# Altium PCB PCB.PcbDoc (part 1 of 2)
Units mm, origin at the board's own origin, x right, y up, seen from the top; angles counter-clockwise.
Board outline 143.9 x 84.61 mm, 2 copper layers (Top Layer, Bottom Layer); 156 components, 117 nets, 550 pads, 1112 vias.
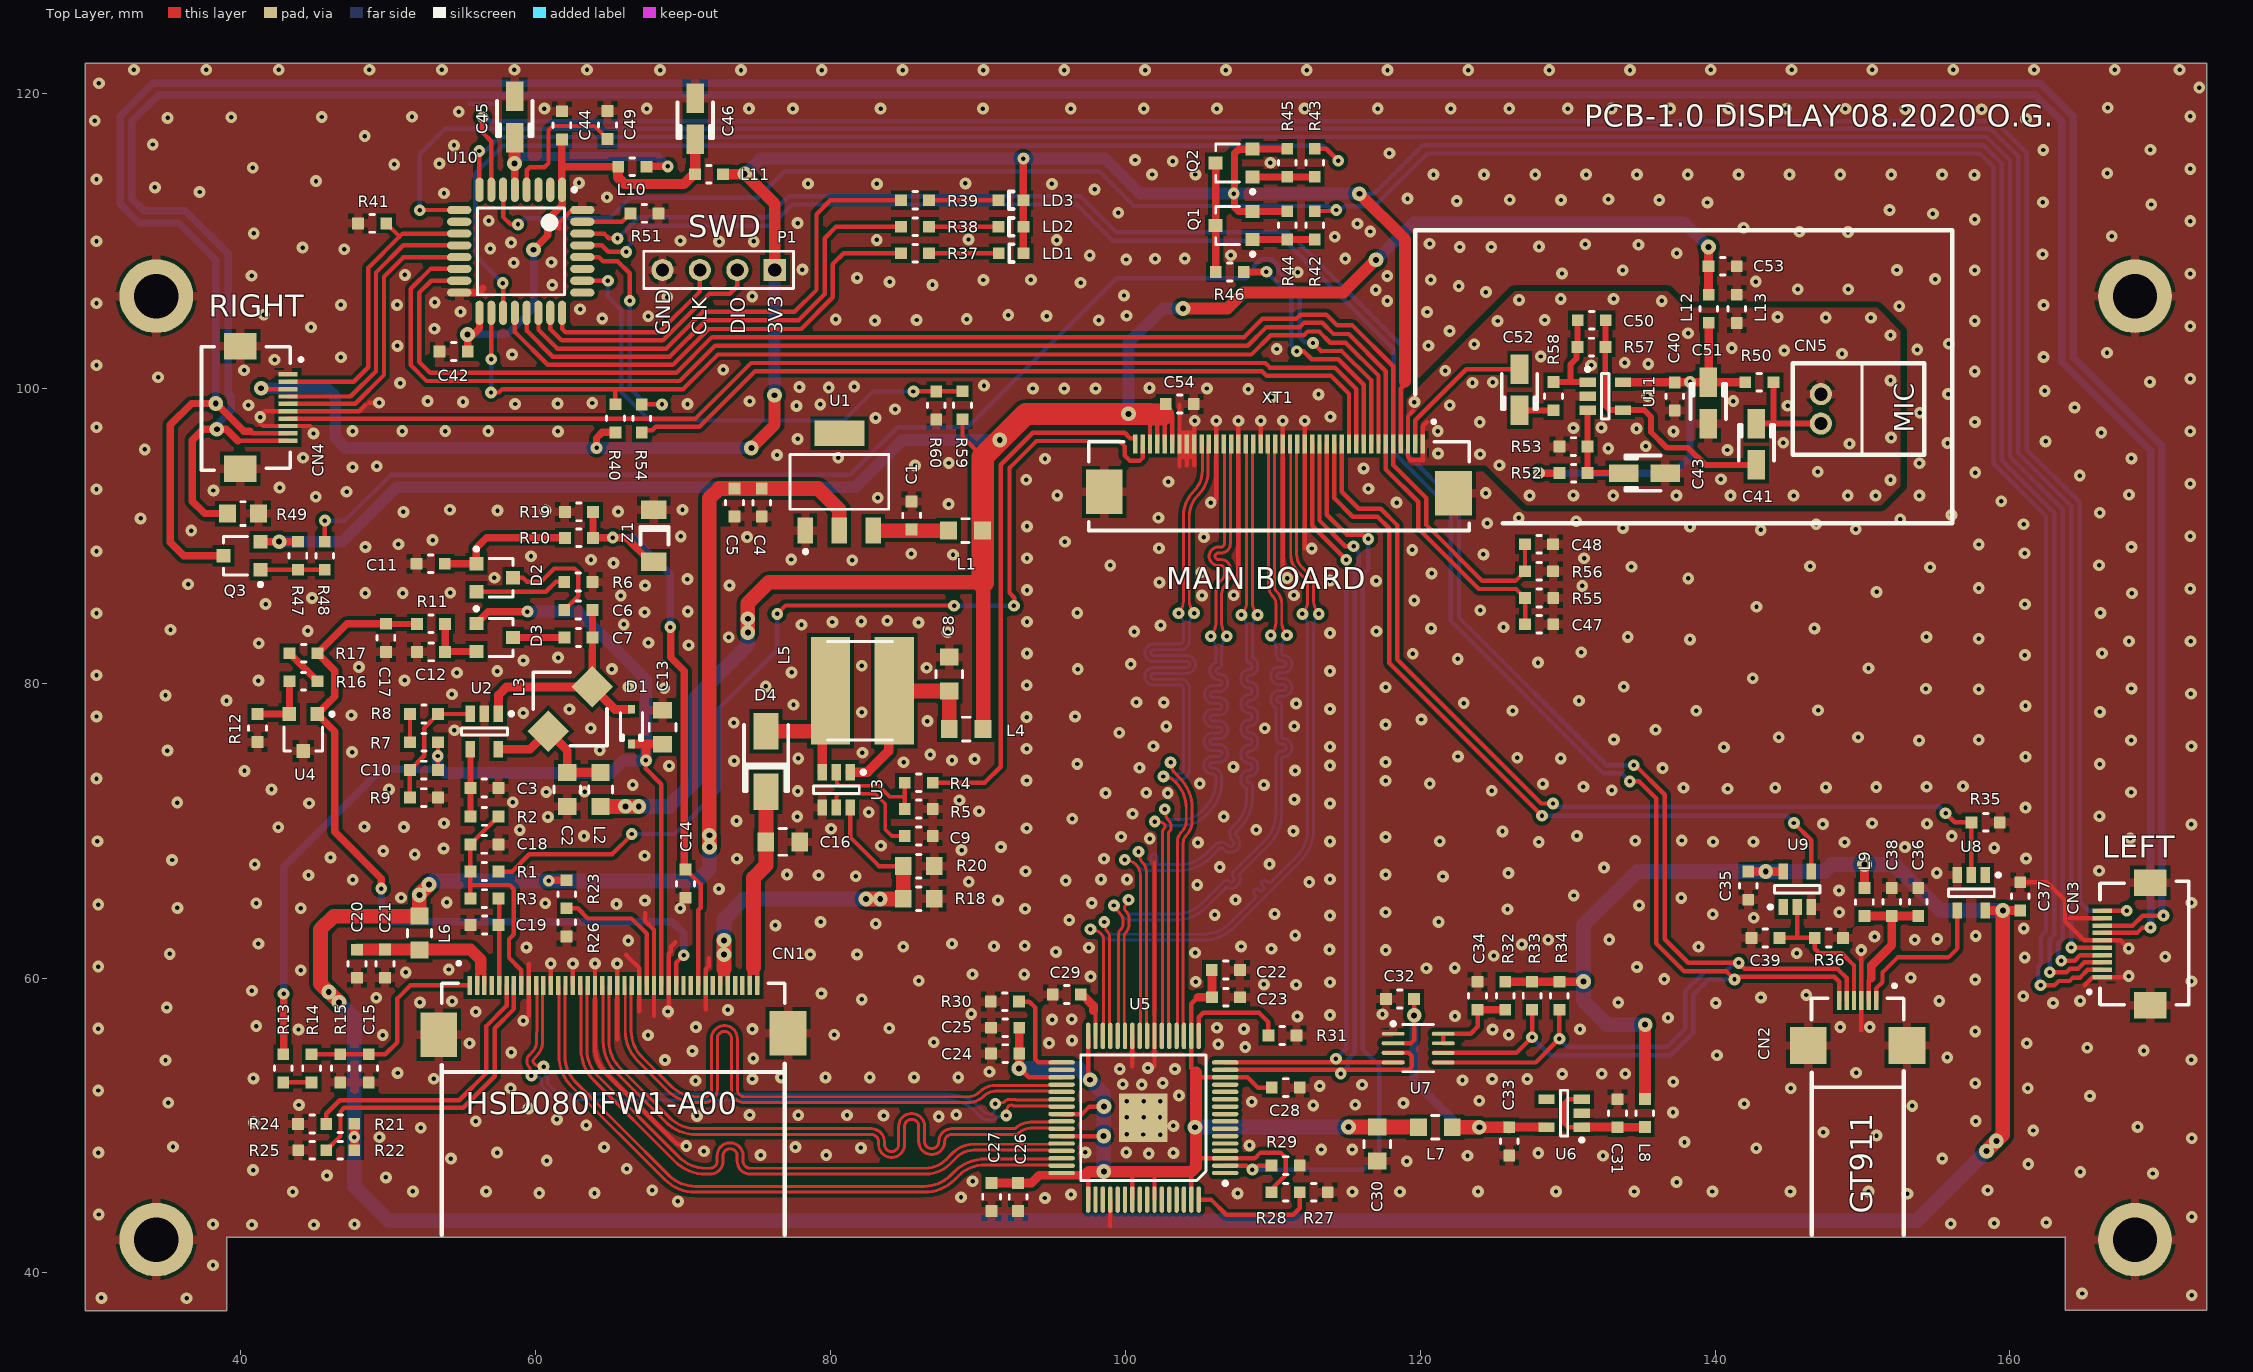
[diagram p0: Top Layer view]
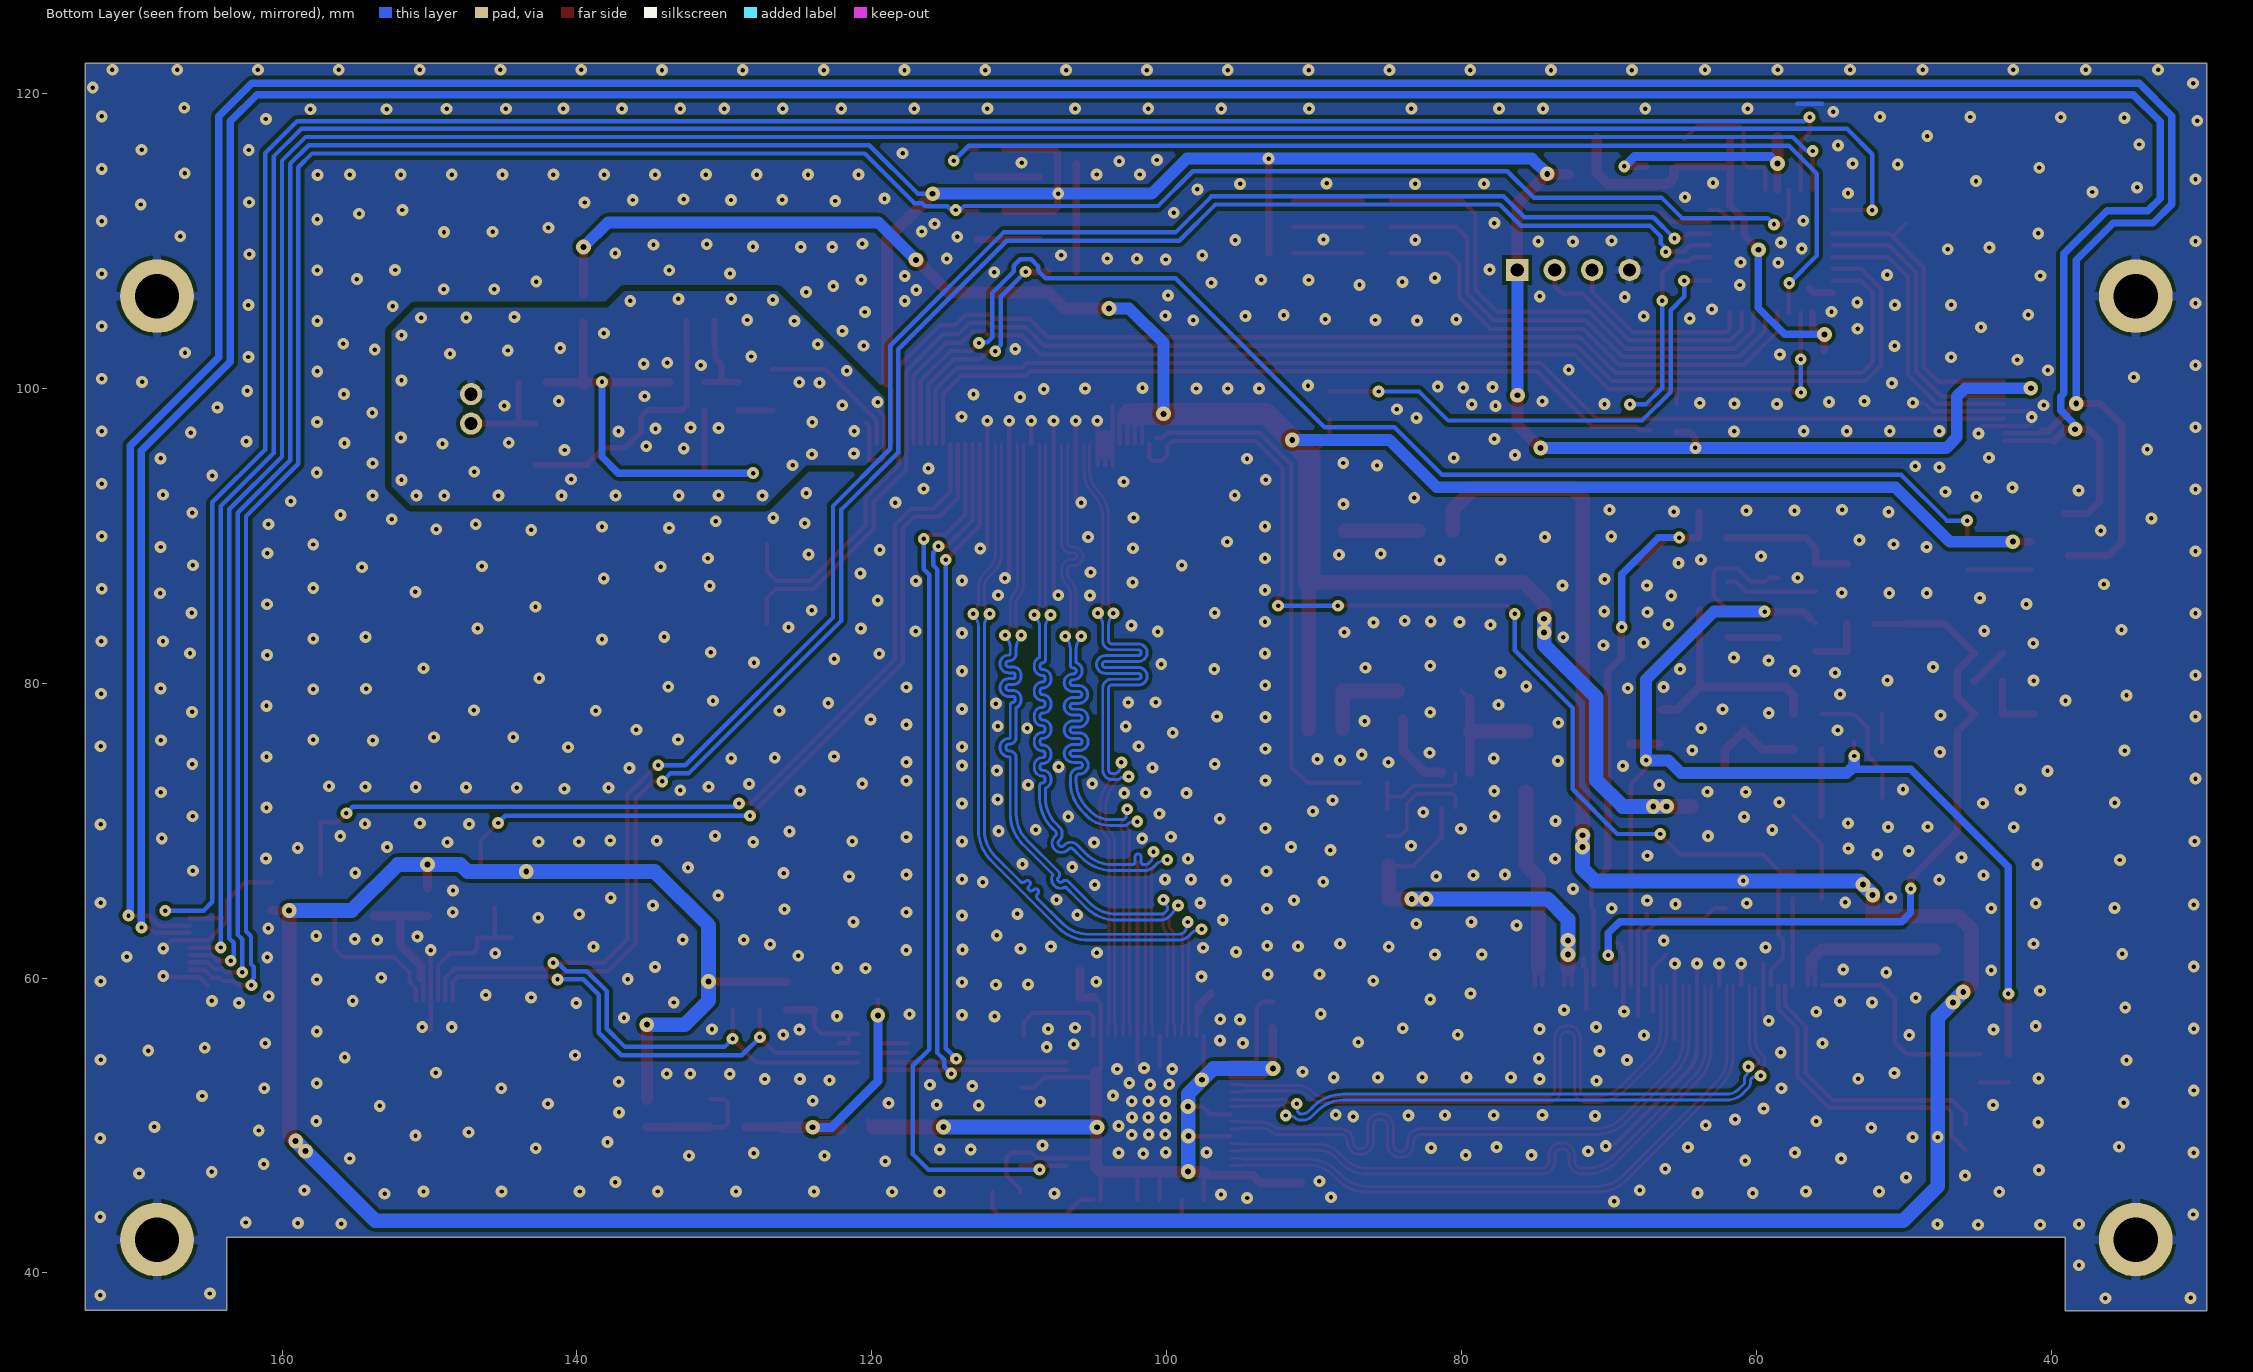
[diagram p1: Bottom Layer view, seen from below]

## Layer stack, top to bottom
Top Solder: solder mask 0.0102, Solder Resist, Dk 3.5
Top Layer: signal copper 0.0356
Dielectric 1: dielectric 0.32, FR-4, Dk 4.8
Bottom Layer: signal copper 0.0356
Bottom Solder: solder mask 0.0102, Solder Resist, Dk 3.5

## Board outline
29.45,37.44 39.06,37.44 39.06,42.43 163.75,42.43 163.75,37.45 173.35,37.45 173.35,122.05 29.45,122.05

## Design rules (kind name [scope] priority, off if disabled: settings)
Clearance [All] p1: gap=0.2 ignorepadtopadclearanceinfootprint=FALSE except(0.25: Arc-Fill Arc-Poly Arc-Region Track-Fill Track-Poly Track-Region SMDPad-Fill SMDPad-Poly SMDPad-Region THPad-Fill THPad-Poly THPad-Region Via-Fill Via-Poly Via-Region; 0.4: Fill-Fill Fill-Poly Fill-Region Poly-Poly Poly-Region Region-Region)
DiffPairsRouting [All] p1: maxlimit=0.254 minlimit=0.2 mostfreqgap=0.2 toplayer_minwidth=0.2 toplayer_maxwidth=0.381 toplayer_prefwidth=0.2 bottomlayer_minwidth=0.2 bottomlayer_maxwidth=0.381 bottomlayer_prefwidth=0.2 maxuncoupledlength=12.7
PolygonConnect [All] p1: thpad.connectstyle=Relief thpad.reliefconductorwidth=0.6 thpad.reliefentries=4 thpad.polygonreliefangle="90 Angle" thpad.airgapwidth=0.254 smdpad.connectstyle=Relief smdpad.reliefconductorwidth=0.6 smdpad.reliefentries=4 smdpad.polygonreliefangle="90 Angle" smdpad.airgapwidth=0.254 via.connectstyle=Direct via.reliefconductorwidth=0.254 via.reliefentries=4 via.polygonreliefangle="90 Angle" via.airgapwidth=0.254
RoomDefinition mipi_to_lvds [InComponentClass('mipi_to_lvds')] p1 off: confinementstyle=ConfineIn formatcopy=TRUE lockcomponents=FALSE outline 57.36,0 108.16,0 108.16,25.4 57.36,25.4
RoomDefinition mcu_mic_amp_connector [InComponentClass('mcu_mic_amp_connector')] p2 off: confinementstyle=ConfineIn formatcopy=TRUE lockcomponents=FALSE outline 179.895,29.05 196.145,29.05 196.145,32.85 179.895,32.85
RoomDefinition touch_panel [InComponentClass('touch_panel')] p3 off: confinementstyle=ConfineIn formatcopy=TRUE lockcomponents=FALSE outline 0,0 52.74,0 52.74,25.4 0,25.4
RoomDefinition panel_power_backlight [InComponentClass('panel_power_backlight')] p4 off: confinementstyle=ConfineIn formatcopy=TRUE lockcomponents=FALSE outline 174.875,22.7 199.725,22.7 199.725,27.925 174.875,27.925
RoutingVias [All] p1: holewidth=0.711 width=1.27 viastyle="Through Hole" minholewidth=0.711 minwidth=1.27 maxholewidth=0.711 maxwidth=1.27
SolderMaskExpansion [All] p1: expansion=0.102
Width [All] p1: maxlimit=2 minlimit=0.2 preferedwidth=0.3 minimp=50.000000 maximp=50.000000 favimp=50.000000
29 further rules are at their usual default settings.

## Classes and differential pairs
component class mcu_mic_amp_connector: C40 C41 C42 C43 C44 C45 C46 C47 C48 C49 C50 C51 C52 C53 C54 CN3 CN4 CN5 L10 L11 L12 L13 LD1 LD2 LD3 P1 P2 Q1 Q2 Q3 R37 R38 R39 R40 R41 R42 R43 R44 R45 R46 R47 R48 R49 R50 R51 R52 R53 R54 R55 R56 R57 R58 R59 R60 U10 U11 XT1
component class touch_panel: C31 C32 C33 C34 C35 C36 C37 C38 C39 CN2 L8 L9 R32 R33 R34 R35 R36 U6 U7 U8 U9
component class mipi_to_lvds: C22 C23 C24 C25 C26 C27 C28 C29 C30 L7 R27 R28 R29 R30 R31 U5
component class panel_power_backlight: C1 C2 C3 C4 C5 C6 C7 C8 C9 C10 C11 C12 C13 C14 C15 C16 C17 C18 C19 C20 C21 CN1 D1 D2 D3 D4 L1 L2 L3 L4 L5 L6 R1 R2 R3 R4 R5 R6 R7 R8 R9 R10 R11 R12 R13 R14 R15 R16 R17 R18 R19 R20 R21 R22 R23 R24 R25 R26 U1 U2 U3 U4 Z1
differential pair MIPI_TX_D3: +MIPI_TX_D3_P -MIPI_TX_D3_N
differential pair MIPI_TX_D2: +MIPI_TX_D2_P -MIPI_TX_D2_N
differential pair MIPI_TX_D1: +MIPI_TX_D1_P -MIPI_TX_D1_N
differential pair MIPI_TX_D0: +MIPI_TX_D0_P -MIPI_TX_D0_N
differential pair MIPI_TX_CLK: +MIPI_TX_CLK_P -MIPI_TX_CLK_N
differential pair LVDS_CLK: +LVDS_CLK_P -LVDS_CLK_N
differential pair LVDS_CH3: +LVDS_CH3_P -LVDS_CH3_N
differential pair LVDS_CH2: +LVDS_CH2_P -LVDS_CH2_N
differential pair LVDS_CH1: +LVDS_CH1_P -LVDS_CH1_N
differential pair LVDS_CH0: +LVDS_CH0_P -LVDS_CH0_N

## Components (designator, comment, footprint, x,y, rotation, side; value= is the part's Value field where it differs from the comment)
C1 "CC0603MRX5R5BB106" C0603 85.5,92.33 r270 top value="10uF 6.3V"
C2 "CL21A226MAQNNNE" C0805 62.14,73.74 r270 top value="22uF 25v"
C3 "CC0603KRX7R9BB105" C0603 55.57,72.895 r0 top value=1uF
C4 "CC0603MRX5R5BB106" C0603 75.335,91.3 r90 top value="10uF 6.3V"
C5 "C1608X7R1H104K080AA" C0603 73.485,93.205 r270 top value=0.1uF
C6 "GRM188R71E474KA12D" C0603 63.85,84.97 r180 top value="0.47uF 25v"
C7 "GRM188R71E474KA12D" C0603 63.855,83.1 r180 top value="0.47uF 25v"
C8 "CL21A226MAQNNNE" C0805 88.05,79.67 r90 top value="22uF 25v"
C9 "CC0603ZRY5V8BB224" C0603 85.035,69.64 r0 top value=0.22uF
C10 "CL10C220JB8NNNC" C0603 51.47,74.105 r0 top value=22pF
C11 "CC0603KRX7R9BB105" C0603 53.83,88.1 r180 top value=1uF
C12 "CC0603KRX7R9BB105" C0603 53.855,82.125 r180 top value=1uF
C13 "CL21A226MAQNNNE" C0805 68.604,76.06 r90 top value="22uF 25v"
C14 "CC0603KRX7R9BB105" C0603 70.16,67.355 r270 top value=1uF
C15 "CC0603KRX7R9BB105" C0603 48.675,54.825 r270 top value=1uF
C16 "CL21A226MAQNNNE" C0805 75.81,69.23 r0 top value="22uF 25v"
C17 "CC0603KRX7R9BB105" C0603 49.84,84.03 r270 top value=1uF
C18 "CL10B103KB8NNNC" C0603 55.57,69.065 r0 top value=0.01uF
C19 "C1608X7R1H104K080AA" C0603 57.48,63.6 r180 top value=0.1uF
C20 "CC0603MRX5R5BB106" C0603 47.875,61.925 r270 top value="10uF 6.3V"
C21 "C1608X7R1H104K080AA" C0603 49.775,60.025 r90 top value=0.1uF
C22 "CL10B103KB8NNNC" C0603 107.77,60.55 r180 top value=0.01uF
C23 "C1608X7R1H104K080AA" C0603 105.875,58.7 r0 top value=0.1uF
C24 "CL10B103KB8NNNC" C0603 90.895,56.625 r0 top value=0.01uF
C25 "C1608X7R1H104K080AA" C0603 92.8,54.875 r180 top value=0.1uF
C26 "CL10B103KB8NNNC" C0603 92.725,44.2 r90 top value=0.01uF
C27 "C1608X7R1H104K080AA" C0603 90.925,46.105 r270 top value=0.1uF
C28 "C1608X7R1H104K080AA" C0603 109.93,52.57 r0 top value=0.1uF
C29 "CL21B105KAFNNNE" C0603 96.98,58.88 r180 top value=1uF
C30 "CL21A226MQQNNNE" C0805 117.08,49.69 r270 top value="22uF 6.3V"
C31 "CC0603MRX5R5BB106" C0603 133.38,51.785 r270 top value="10uF 6.3V"
C32 "C1608X7R1H104K080AA" C0603 117.675,58.58 r0 top value=0.1uF
C33 "CC0603MRX5R5BB106" C0603 126.04,47.97 r90 top value="10uF 6.3V"
C34 "C1608X7R1H104K080AA" C0603 123.89,57.845 r90 top value=0.1uF
C35 "C1608X7R1H104K080AA" C0603 142.25,65.315 r90 top value=0.1uF
C36 "C1608X7R1H104K080AA" C0603 153.79,66.115 r270 top value=0.1uF
C37 "C1608X7R1H104K080AA" C0603 160.7,66.495 r270 top value=0.1uF
C38 "CC0603MRX5R5BB106" C0603 151.99,66.115 r270 top value="10uF 6.3V"
C39 "GRM1885C1H8R0DA01D" C0603 142.465,62.72 r0 top value=8pF
C40 "CC0603KRX7R9BB104" C0603 137.26,98.5 r90 top value=0.1uF
C41 "293D105X9035A2TE3" TANTAL-A-1206 142.8,96.21 r270 top value=1uF
C42 "CC0603KRX7R9BB104" C0603 53.485,102.5 r0 top value=0.1uF
C43 "293D225X9010A2TE3" TANTAL-A-1206 135.22,94.25 r0 top value=2.2uF
C44 "CC0603KRX7R9BB104" C0603 61.78,118.795 r270 top value=0.1uF
C45 "293D226X9010A2TE3" TANTAL-A-1206 58.58,118.41 r90 top value=22uF
C46 "293D226X9010A2TE3" TANTAL-A-1206 70.82,118.29 r90 top value=22uF
C47 "CL10B103KB8NNNC" C0603 127.115,84 r0 top value=0.01uF
C48 "CL10B103KB8NNNC" C0603 127.11,89.42 r0 top value=0.01uF
C49 "CC0603KRX7R9BB104" C0603 64.87,116.915 r90 top value=0.1uF
C50 "CC0603GRNPO9BN150" C0603 130.68,104.62 r0 top value=15pF
C51 "293D226X9010A2TE3" TANTAL-A-1206 139.541,99 r270 top value=22uF
C52 "293D105X9035A2TE3" TANTAL-A-1206 126.74,99.9 r90 top value=1uF
C53 "CC0603KRX7R9BB104" C0603 141.47,108.29 r180 top value=0.1uF
C54 "C1608X7R1H104K080AA" C0603 102.735,98.94 r0 top value=0.1uF
CN1 "FH12-40" 40S-0.5SH#1 65.275,59.5 r180 top locked value=HSD080IFW1-A00
CN2 "Touch panel" 6S-0.5SH 149.675,58.475 r0 top
CN3 "LEFT" 10S-0.5SH 169.26,62.41 r90 top locked
CN4 "RIGHT" 10S-0.5SH 40.2,98.6 r270 top locked
CN5 "MIC" MW-2M 147.78,98.61 r90 top locked value=MW-2MR
D1 "PMEG2010EJ.115" SOD-323 66.5,77.05 r270 top value=1A
D2 "BAV99.215" SOT-23-3 57.225,87.15 r270 top value=BAV99
D3 "BAV99.215" SOT-23-3 57.225,83.1 r270 top value=BAV99
D4 "SS24" SMA 75.625,74.69 r270 top
L1 "BLM21PG221SN1D" IND0805 90.1,90.355 r180 top value=EMIF
L2 "BLM21PG221SN1D" IND0805 64.4,71.84 r90 top value=EMIF
L3 "CDRH3D16NP-100NC" CDRH3D16 62.338,78.25 r90 top value=10uH
L4 "BLM21PG221SN1D" IND0805 90.15,76.89 r180 top value=EMIF
L5 "CDRH6D28-100NC" CDRH6D28 82,79.49 r180 top locked value=10uH
L6 "BLM21PG221SN1D" IND0805 52.12,62.1 r90 top value=EMIF
L7 "BLM21PG221SN1D" IND0805 121.98,49.88 r180 top value=EMIF
L8 "BLM18AG102SN1D" IND0603 135.24,49.89 r90 top value=EMIF
L9 "BLM18AG102SN1D" IND0603 150.13,66.105 r270 top value=EMIF
L10 "BLM18AG102SN1D" IND0603 65.605,115.03 r0 top value=EMIF
L11 "BLM18AG102SN1D" IND0603 72.705,114.53 r180 top value=EMIF
L12 "BLM18AG102SN1D" IND0603 139.57,106.355 r270 top value=EMIF
L13 "BLM18AG102SN1D" IND0603 141.47,106.345 r270 top value=EMIF
LD1 "FYLS-0603URC" LED0603 92.2,109.17 r0 top
LD2 "KPT-1608SGC" LED0603 92.19,110.96 r0 top
LD3 "FYLS-0603UYC" LED0603 92.19,112.76 r0 top
P1 "SWD" PLS-4 76.22,108.03 r180 top
Q1 "IRLML6402" SOT-23-3 107.38,111.05 r90 top
Q2 "IRLML6402" SOT-23-3 107.38,115.29 r90 top
Q3 "IRLML6402" SOT-23-3 40.08,88.65 r90 top
R1 "100" R0603 57.475,67.225 r180 top
R2 "47k" R0603 57.475,70.965 r180 top
R3 "47k" R0603 55.575,65.39 r0 top
R4 "100" R0603 86.94,73.25 r180 top
R5 "47k" R0603 85.035,71.465 r0 top
R6 "100" R0603 63.85,86.87 r180 top
R7 "120k" R0603 53.375,76 r180 top value="120k 1%"
R8 "750" R0603 51.475,77.91 r0 top
R9 "18k" R0603 51.47,72.24 r0 top value="18k 1%"
R10 "2k" R0603 63.885,89.86 r180 top
R11 "330" R0603 51.95,84.025 r0 top
R12 "3k" R0603 41.13,77.91 r270 top value="3.09k 1%"
R13 "RC0603FR-0720KL" R0603 42.875,54.83 r270 top value="20k 1%"
R14 "RC0603FR-071K5L" R0603 44.8,52.925 r90 top value="1.5k 1%"
R15 "10kRC0603FR-0710KL" R0603 46.75,54.83 r270 top value="10k 1%"
R16 "0" R0603 43.3,80.13 r0 top
R17 "19.1k 1%" R0603 45.205,82.03 r180 top
R18 "RC0805FR-071RL" R0805 85.03,65.37 r0 top value=1
R19 "470k" R0603 63.885,91.62 r180 top
R20 "RES 0805 2R4 5%" R0805 85.03,67.595 r0 top value=2.4
R21 "0" R0603 45.795,50.11 r0 top
R22 "DNI" R0603 45.795,48.32 r0 top value=NI
R23 "DNI" R0603 62.1,64.73 r90 top value=NI
R24 "DNI" R0603 43.887,50.097 r0 top value=NI
R25 "0" R0603 43.895,48.32 r0 top
R26 "0" R0603 62.1,62.825 r90 top
R27 "10k" R0603 111.825,45.475 r0 top
R28 "DNI" R0603 109.92,45.475 r0 top
R29 "10k" R0603 109.92,47.28 r0 top value=100k
R30 "10k" R0603 92.78,58.4 r180 top
R31 "10k" R0603 109.7,56.1 r0 top
R32 "200k" R0603 125.765,57.845 r90 top
R33 "4.7k" R0603 127.59,57.845 r90 top
R34 "4.7k" R0603 129.44,57.845 r90 top
R35 "47k" R0603 157.405,70.56 r0 top value=100k
R36 "47k" R0603 146.765,62.72 r0 top value=100k
R37 "1k" R0603 84.785,109.17 r0 top
R38 "1k" R0603 84.785,110.96 r0 top
R39 "1k" R0603 84.785,112.76 r0 top
R40 "20k" R0603 65.41,97.015 r90 top
R41 "100k" R0603 49.86,111.19 r180 top
R42 "1k" R0603 112.84,110.105 r90 top
R43 "1k" R0603 112.84,116.255 r270 top
R44 "100k" R0603 110.98,112.01 r270 top
R45 "100k" R0603 110.98,116.255 r270 top
R46 "1k" R0603 106.125,107.896 r0 top
R47 "47k" R0603 43.87,87.69 r90 top
R48 "1k" R0603 45.69,89.595 r270 top
R49 "0" R0805 39.2,91.51 r0 top
R50 "5.6k" R0603 143.96,100.41 r180 top
R51 "1k" R0603 68.33,111.87 r180 top
R52 "100k" R0603 131.35,94.25 r180 top
R53 "100k" R0603 129.445,96.05 r0 top
R54 "100" R0603 67.2,97.01 r90 top
R55 "100k" R0603 129.02,85.78 r180 top
R56 "100k" R0603 129.015,87.59 r180 top
R57 "75k" R0603 132.57,102.8 r180 top
R58 "49.9" R0603 129.04,98.52 r90 top
R59 "47k" R0603 88.95,97.905 r90 top
R60 "100k" R0603 87.17,97.89 r90 top
U1 "LM1117" SOT-223 80.6,93.65 r0 top value=LM1117-3.3
U2 "TPS61040" SOT-23-5 56.525,76.725 r270 top
U3 "TPS61165" SOT-23-6 80.4,72.765 r180 top locked value=TPS61165DBV
U4 "LM431ACM3" SOT-23-3 44.23,76.655 r180 top
U5 "SN65DSI83" HPM064_N 101.225,50.525 r180 top locked
U6 "TLV75718PDBVR" SOT-23-5 129.76,50.84 r180 top value=TLV733P
U7 "PCA9306DCTR" PSOP-8 119.865,55.245 r0 top locked
U8 "SN74LVC1G17" SOT-23-5 157.39,65.79 r270 top locked value=SN74LVC1G08
U9 "SN74LVC1G17" SOT-23-5 145.58,66.02 r90 top locked value=SN74LVC1G08
U10 "STM32L052K6/K8" STM-LQFP32_N 58.99,109.3 r270 top
U11 "OPA172IDBVR" SOT-23-5 132.56,99.47 r0 top
XT1 "FH12-40" 40S-0.5SH#2 110.42,96.23 r0 top locked
Z1 "BZV55-C10.115" SOD-80C 68.01,90 r90 top value=10V

## Footprints (in the part's own frame and the unit in brackets; to place one, negate y for a bottom-side part, rotate by r counter-clockwise, add the part's x,y. Pads: shape width x height; smd on the part's side, far side on the other; paste and mask are expansions set on the pad)
6S-0.5SH [mm]
  rect 0.3x1.3 smd: 1(1.25,0) 2(0.75,0) 3(0.25,0) 4(-0.25,0) 5(-0.75,0) 6(-1.25,0)
  rect 2.5x2.5 smd: ""(-3.35,-3.05) ""(3.35,-3.05)
  silkscreen extent -3.12,-5.87 3.12,1.1, body extent -4.25,-4.8 4.25,0.1, height 1.9
10S-0.5SH [mm]
  rect 0.3x1.3 smd: 1(-2.35,3) 2(-1.85,3) 3(-1.35,3) 4(-0.85,3) 5(-0.35,3) 6(0.15,3) 7(0.65,3) 8(1.15,3) 9(1.65,3) 10(2.15,3)
  rect 1.8x2.2 smd: ""(-4.25,-0.25) ""(4.05,-0.25)
  silkscreen extent -4.23,-2.88 4.15,3.98, body extent -5.31,-2.11 5.12,3, height 2.1
40S-0.5SH#1 [mm]
  rect 0.3x1.3 smd: 1(9.75,0) 2(9.25,0) 3(8.75,0) 4(8.25,0) 5(7.75,0) 6(7.25,0) 7(6.75,0) 8(6.25,0) 9(5.75,0) 10(5.25,0) 11(4.75,0) 12(4.25,0) 13(3.75,0) 14(3.25,0) 15(2.75,0) 16(2.25,0) 17(1.75,0) 18(1.25,0) 19(0.75,0) 20(0.25,0) 21(-0.25,0) 22(-0.75,0) 23(-1.25,0) 24(-1.75,0) 25(-2.25,0) 26(-2.75,0) 27(-3.25,0) 28(-3.75,0) 29(-4.25,0) 30(-4.75,0) 31(-5.25,0) 32(-5.75,0) 33(-6.25,0) 34(-6.75,0) 35(-7.25,0) 36(-7.75,0) 37(-8.25,0) 38(-8.75,0) 39(-9.25,0) 40(-9.75,0)
  rect 2.5x3 smd: ""(-11.85,3.25) ""(11.85,3.35)
  silkscreen extent -11.62,-1.6 11.65,5.87, body extent -12.75,-0.2 12.75,5.4
40S-0.5SH#2 [mm]
  rect 0.3x1.3 smd: 1(9.75,0) 2(9.25,0) 3(8.75,0) 4(8.25,0) 5(7.75,0) 6(7.25,0) 7(6.75,0) 8(6.25,0) 9(5.75,0) 10(5.25,0) 11(4.75,0) 12(4.25,0) 13(3.75,0) 14(3.25,0) 15(2.75,0) 16(2.25,0) 17(1.75,0) 18(1.25,0) 19(0.75,0) 20(0.25,0) 21(-0.25,0) 22(-0.75,0) 23(-1.25,0) 24(-1.75,0) 25(-2.25,0) 26(-2.75,0) 27(-3.25,0) 28(-3.75,0) 29(-4.25,0) 30(-4.75,0) 31(-5.25,0) 32(-5.75,0) 33(-6.25,0) 34(-6.75,0) 35(-7.25,0) 36(-7.75,0) 37(-8.25,0) 38(-8.75,0) 39(-9.25,0) 40(-9.75,0)
  rect 2.5x3 smd: ""(-11.85,-3.25) ""(11.85,-3.35)
  silkscreen extent -12.9,-5.87 12.9,1.6, body extent -12.75,-5.4 12.75,0.2, height 2
C0603 [mm]
  rect 0.8x0.8 smd: 1(1.905,0) 2(0,0)
  silkscreen extent 0.8,-0.6 1.1,0.6, body extent 0.2,-0.4 1.8,0.4, height 0.9
C0805 [mm]
  rect 1.14x1.27 smd: 1(2.1,0) 2(-0.2,0)
  silkscreen extent 0.7,-0.9 1.2,0.9, body extent 0,-0.6 2,0.6, height 0.9
CDRH3D16 [mm] "Precision Wire Wound Inductor, 2-Leads, Body 3,90x3,90mm, IPC Medium Density"
  rect 2x2 smd rot 135: 1(-1.5,1.5) 2(1.5,-1.5)
  silkscreen extent -2.5,-2.5 2.5,2.5, body extent -2.02,-2.02 2.02,2.02, height 2
CDRH6D28 [mm] "SMD Power Inductor CDRH6D28"
  rect 2.65x7.3 smd: 1(-2.325,0) 2(2,0)
  silkscreen extent -2.2,-3.35 2.2,3.35, body extent -3.35,-3.35 3.35,3.35, height 3
HPM064_N [mm] "64-Pin Thin Quad Flat Pack 0.5 mm Pitch, IPC Medium Density"
  oval 1.8x0.3 smd: 1(-5.55,3.75) 2(-5.55,3.25) 3(-5.55,2.75) 4(-5.55,2.25) 5(-5.55,1.75) 6(-5.55,1.25) 7(-5.55,0.75) 8(-5.55,0.25) 9(-5.55,-0.25) 10(-5.55,-0.75) 11(-5.55,-1.25) 12(-5.55,-1.75) 13(-5.55,-2.25) 14(-5.55,-2.75) 15(-5.55,-3.25) 16(-5.55,-3.75) 33(5.55,-3.75) 34(5.55,-3.25) 35(5.55,-2.75) 36(5.55,-2.25) 37(5.55,-1.75) 38(5.55,-1.25) 39(5.55,-0.75) 40(5.55,-0.25) 41(5.55,0.25) 42(5.55,0.75) 43(5.55,1.25) 44(5.55,1.75) 45(5.55,2.25) 46(5.55,2.75) 47(5.55,3.25) 48(5.55,3.75)
  oval 0.3x1.8 smd: 17(-3.75,-5.55) 18(-3.25,-5.55) 19(-2.75,-5.55) 20(-2.25,-5.55) 21(-1.75,-5.55) 22(-1.25,-5.55) 23(-0.75,-5.55) 24(-0.25,-5.55) 25(0.25,-5.55) 26(0.75,-5.55) 27(1.25,-5.55) 28(1.75,-5.55) 29(2.25,-5.55) 30(2.75,-5.55) 31(3.25,-5.55) 32(3.75,-5.55) 49(3.75,5.55) 50(3.25,5.55) 51(2.75,5.55) 52(2.25,5.55) 53(1.75,5.55) 54(1.25,5.55) 55(0.75,5.55) 56(0.25,5.55) 57(-0.25,5.55) 58(-0.75,5.55) 59(-1.25,5.55) 60(-1.75,5.55) 61(-2.25,5.55) 62(-2.75,5.55) 63(-3.25,5.55) 64(-3.75,5.55)
  rect 3.3x3.3 smd: 65(0,0)
  silkscreen extent -5.68,-4.25 4.25,4.57, body extent -6.01,-6.01 6.01,6.01, height 1.2
IND0603 [mm]
  rect 0.8x0.8 smd: 1(1.905,0) 2(0,0)
  silkscreen extent 0.8,-0.6 1.1,0.6
IND0805 [mm]
  rect 1.14x1.2 smd: 1(2.1,0) 2(-0.2,0)
  silkscreen extent 0.7,-0.8 1.2,0.8, body extent -0.1,-0.6 1.9,0.6, height 0.95
LED0603 [mm]
  rect 0.8x0.8 smd: 1(-0.789,0) 2(0.891,0)
  silkscreen extent -0.08,-0.6 0.22,0.6, body extent -0.78,-0.37 0.87,0.36, height 0.68
MW-2M [mm] "Connector; Header; 2 Position"
  round 1.5 hole 0.9: 1(-1,0.6) 2(1,0.6)
  silkscreen extent -3.1,-2.2 3.1,2.5, body extent -3,-2.1 3,2.4, height 6
PLS-4 [mm] "Connector; Header; 4 Position"
  rect 1.5x1.5 hole 0.9: 1(0,0)
  round 1.5 hole 0.9: 2(2.54,0) 3(5.08,0) 4(7.62,0)
  silkscreen extent -1.27,-1.27 8.89,1.27, body extent -1.27,-1.27 8.89,1.27, height 8.44
PSOP-8 [mm] "PSOP, 8-Leads, Body 2,95x2,80mm, Pitch 0,65mm, IPC Medium Density"
  oval 1.55x0.25 smd: 1(-1.7,0.975) 2(-1.7,0.325) 3(-1.7,-0.325) 4(-1.7,-0.975) 5(1.7,-0.975) 6(1.7,-0.325) 7(1.7,0.325) 8(1.7,0.975)
  silkscreen extent -1.82,-1.6 1.05,1.77, body extent -2,-1.6 2,1.6, height 1.3
R0603 [mm]
  rect 0.8x0.8 smd: 1(1.905,0) 2(0,0)
  silkscreen extent 0.8,-0.6 1.1,0.6, body extent 0.2,-0.4 1.8,0.4, height 0.5
R0805 [mm]
  rect 1.14x1.2 smd: 1(2,0) 2(-0.1,0)
  silkscreen extent 0.79,-0.8 1.1,0.8, body extent 0,-0.6 2,0.6, height 0.5
SMA [mm]
  rect 2.5x1.7 smd: 1(-2.05,0) 2(2.05,0)
  silkscreen extent -2.5,-1.5 2,1.5, body extent -2.5,-1.35 2.5,1.35, height 2.15
SOD-80C [mm]
  rect 1.25x1.7 smd: 1(-1.775,0) 2(1.775,0)
  silkscreen extent -0.6,-1 0.6,0.9, body extent -1.82,-0.8 1.88,0.8, height 1.6
SOD-323 [mm]
  rect 0.59x0.45 smd: 1(-1.175,0) 2(1.175,0)
  silkscreen extent -0.95,-0.75 0.95,0.75, body extent -1.3,-0.68 1.3,0.67, height 1.1
SOT-23-3 [mm]
  rect 0.9x0.95 smd: 1(-0.95,-1.25) 2(0.95,-1.25) 3(0,1.25)
  silkscreen extent -2.07,-1.37 1.3,1.25, body extent -1.52,-1.29 1.48,1.25, height 1.1
SOT-23-5 [mm] "SOT23, 5-Leads, Body 2.9x1.6mm, Pitch 0.95mm, Lead Span 2.8mm, IPC Medium Density"
  rect 1.1x0.65 smd: 1(-1.2,0.95) 2(-1.2,0) 3(-1.2,-0.95) 4(1.2,-0.95) 5(1.2,0.95)
  silkscreen extent -1.32,-1.55 0.25,1.95, body extent -1.44,-1.5 1.4,1.5, height 1.1
SOT-23-6 [mm] "SOT23, 6-Leads, Body 2.9x1.6mm, Pitch 0.95mm, Lead Span 2.8mm, IPC Medium Density"
  rect 0.65x1.1 smd: 1(-0.95,-1.2) 2(0,-1.2) 3(0.95,-1.2) 4(0.95,1.2) 5(0,1.2) 6(-0.95,1.2)
  silkscreen extent -1.95,-1.32 1.55,0.25, body extent -1.55,-1.53 1.55,1.53, height 1.45
SOT-223 [mm]
  rect 1.05x1.75 smd: 1(-2.3,-3.3) 2(0,-3.3) 3(2.3,-3.3)
  rect 3.4x1.75 smd: 4(0,3.3)
  silkscreen extent -3.35,-4.85 3.35,1.85, body extent -3.25,-3.43 3.25,3.46, height 1.6
STM-LQFP32_N [mm] "QFP, 32-Leads, Body 7x7mm, Pitch 0.8mm, IPC Medium Density"
  oval 1.65x0.55 smd: 1(-4.175,2.8) 2(-4.175,2) 3(-4.175,1.2) 4(-4.175,0.4) 5(-4.175,-0.4) 6(-4.175,-1.2) 7(-4.175,-2) 8(-4.175,-2.8) 17(4.175,-2.8) 18(4.175,-2) 19(4.175,-1.2) 20(4.175,-0.4) 21(4.175,0.4) 22(4.175,1.2) 23(4.175,2) 24(4.175,2.8)
  oval 0.55x1.65 smd: 9(-2.8,-4.175) 10(-2,-4.175) 11(-1.2,-4.175) 12(-0.4,-4.175) 13(0.4,-4.175) 14(1.2,-4.175) 15(2,-4.175) 16(2.8,-4.175) 25(2.8,4.175) 26(2,4.175) 27(1.2,4.175) 28(0.4,4.175) 29(-0.4,4.175) 30(-1.2,4.175) 31(-2,4.175) 32(-2.8,4.175)
  silkscreen extent -4.3,-2.95 2.95,3.75, body extent -4.57,-4.57 4.57,4.57, height 1.62
TANTAL-A-1206 [mm]
  rect 2x1.2 smd: 1(-1.4,0) 2(1.4,0)
  silkscreen extent -1.3,-1.2 1.1,1.2, body extent -1.6,-0.8 1.6,0.8, height 1.8

## Part data
C1 C2 C3 C4 C5 C6 C7 C8 C9 C10 C11 C12 C13 C14 C15 C16 C17 C18 C19 C20 C21 C22 C23 C24 C25 C26 C27 C28 C29 C30 C31 C32 C33 C34 C35 C36 C37 C38 C39 C40 C42 C44 C47 C48 C49 C50 C53 C54: library part CAP_NPOL, "CAP_NPOL"
C41 C43 C45 C46 C51 C52: library part CAP_POL, "CAP_POL"
CN1 XT1: "DT38"
CN2: library part "Header 6", "Header, 6-Pin", LatestRevisionDate=17-Jul-2002, LatestRevisionNote="Re-released for DXP Platform.", Publisher="Altium Limited"
CN3 CN4: library part "HDR 10", "Header, 10-Pin", LatestRevisionDate=17-Jul-2002, LatestRevisionNote="Re-released for DXP Platform.", Publisher="Altium Limited"
CN5: library part "HDR 2", "Header, 2-Pin", LatestRevisionDate=17-Jul-2002, LatestRevisionNote="Re-released for DXP Platform.", Publisher="Altium Limited"
D1 D4: library part SHOTTKY, "SHOTTKY"
D2 D3: library part DIODE_DUAL_1, "Dual series 1"
L1 L2 L4 L6 L7 L8 L9 L10 L11 L12 L13: library part IND_WO_IRON, "IND_WO_IRON"
L3 L5: library part IND_W_IRON, "IND_W_IRON"
LD1: library part LED_RED, "LED Red"
LD2: library part LED_GREEN, "LED Green"
LD3: library part LED_YELLOW, "LED Yellow"
P1: library part "HDR 4", "Header, 4-Pin", LatestRevisionDate=17-Jul-2002, LatestRevisionNote="Re-released for DXP Platform.", Publisher="Altium Limited"
Q1 Q2 Q3: library part P-Channel, "HEXFET Power MOSFET"
R1 R4: library part RESISTOR
R2 R3 R5 R6 R7 R8 R9 R10 R11 R12 R13 R14 R15 R16 R17 R18 R19 R20 R21 R22 R23 R24 R25 R26 R27 R28 R29 R30 R31 R32 R33 R34 R35 R36 R37 R38 R39 R40 R41 R42 R43 R44 R45 R46 R47 R48 R49 R50 R51 R52 R53 R54 R55 R56 R57 R58 R59 R60: library part RESISTOR, "RES"
U2: library part TPS6104x
U3: library part TPS61165DBV, "TPS61165DBV (SOT-23-6 package)"
U4: "Adjustable Precision Zener Shunt Regulator, 3-pin SOT-23", Manufacturer="National Semiconductor", PackageTopMarking=N1F*XTT, PowerWise=N, Supplier Part Number 1=1215209, ComponentLink1Description="LM431 Datasheet", ComponentLink1URL=http://www.national.com/ds/LM/LM431.pdf, ComponentLink2Description="LM431 Web Page", ComponentLink2URL=http://www.national.com/pf/LM/LM431.html, ComponentLink3Description="MF03A Package Page", ComponentLink3URL=http://www.national.com/packaging/folders/mf03a.html, CompType=MiscPower, DatasheetVersion=Mar-2005, PackageDescription="Molded SOT-23, .115 x .051 x .037in Body, 3 Lead, .075 in Pitch", PackageReference=MF03A, PackageVersion="revB, Mar-2003", PartNumber=LM431ACM3, PinCount=3, Published=4-Dec-2008, Publisher="Altium Limited", RoHS=N, Supplier 1=Farnell
U5: "Single-Channel MIPI® DSI to Single-Link LVDS Bridge"
U6: library part TLV733P, "Capacitor-Free, 300-mA, Low-Dropout Regulator with Foldback Current Limit for Portable Devices"
U7: library part PCA9306, "PCA9306 Dual Bidirectional I2C Bus and SMBus Voltage-Level Translator"
U8 U9: "Single Schmitt-Trigger Buffer"
U10: "Ultra-low power ARM Cortex-M0+ MCU with 64 Kbytes Flash, 32 MHz CPU, USB", I/Os (High Current)=15, Operating Frequency(F) (Processor speed) (MHz)=48, PartNumber=STM32F050F6P7, Supplier Part Number 1=19X6195, Supply Voltage(Vcc) min (V)=2, ComponentLink1Description="Manufacturer URL", ComponentLink1URL=http://www.st.com/web/en/home.html, ComponentLink2Description=Datasheet, ComponentLink2URL=http://www.st.com/st-web-ui/static/active/en/resource/technical/document/datasheet/DM00065136.pdf, ComponentLink3Description="Package Specification", ComponentLink3URL=http://www.st.com/st-web-ui/static/active/en/resource/technical/document/datasheet/DM00065136.pdf, Core="ARM Cortex-M0", DatasheetVersion="Rev. 1", FLASH Size (Prog) (kB)=32, Internal RAM Size (kB)=4, Mounting Technology="Surface Mount", PackageDescription="20-Pin Thin Shrink Small Outline Package, 6.5 x 4.4 mm Body, 0.65 mm Pitch", PackageReference=TSSOP20, PackageVersion="Rev. 1, 11/2012", Packing=Tube, Supplier 1=Newark, Supplier 2=Mouser, Supplier Part Number 2=511-STM32F050F6P7
U11: "OPAx172 36-V, Single-Supply, 10-MHz, Rail-to-Rail Output Operational Amplifiers"
Z1: library part ZENNER, "ZENNER"

## Free pads (board coordinates)
  round 5 hole 3: ""(34.263,42.253) ""(34.263,106.253) ""(168.488,42.253) ""(168.488,106.253)

## Via types
v1: diameter 0.8, hole 0.3, Top Layer to Bottom Layer, tented both sides, 1066 vias
v2: diameter 1, hole 0.4, Top Layer to Bottom Layer, tented both sides, 46 vias

## Nets (pads, with @x,y where several pads share a name; then routed paths per layer and width w, separated by ;. In a path a pad name is that pad's centre, name@x,y a point inside that pad or via, vN(x,y) a via of type N, cw(c..) or ccw(c..) an arc to the next point about the centre after c; other vN are vias at no path point)
1V8: C32.1 C33.1 L7.2 U6.5 U7.2 | length 21.5
  Top Layer w0.3: U7.2@117.51,55.57 U7.2@118.165,55.57 119.37,55.57 119.6,55.8 C32.1@119.6,58.58 ; C33.1@126.04,49.875 C33.1@126.055,49.89
  Top Layer w0.6: C33.1@126.055,49.89 U6.5@128.56,49.89
  Top Layer w0.8: v2(124.01,49.88) 126.025,49.88 C33.1@126.025,49.87
  Top Layer w1: L7.2@122.18,49.88 v2(124.01,49.88)
  Bottom Layer w0.3: v2@124,49.87 v2(124.01,49.88)
  Bottom Layer w0.6: v2(119.59,57.47) 119.59,53 122.72,49.87 v2@124,49.87
3V3: C4.1 C5.2 C35.1 C37.1 L6.1 L8.1 L9.2 R21.1 R22.1 R23.1 R32.1 R33.1 R34.1 U1.2 U8.5 U9.5 | length 278.6
  Top Layer w0.3: v1(60.89,66.6) v1@60.925,66.635
  Top Layer w0.5: v1@60.925,66.635 R23.1@62.1,66.635
  Top Layer w0.6: R22.1@47.7,48.32 v1(47.7,49.215) R21.1@47.7,50.11 ; R32.1@125.765,59.75 R33.1@127.59,59.75 R34.1@129.44,59.75 v2@131.07,59.75 ; v2@135.24,56.82 v2(135.26,56.84) ; C35.1@142.25,67.22 v2(143.44,67.22) U9.5@144.63,67.22 ; L9.2@150.13,66.105 v2(150.13,67.7) ; U8.5@158.34,64.59 v2(159.52,64.59) C37.1@160.7,64.59
  Top Layer w0.8: L8.1@135.24,51.795 v2@135.24,56.82
  Top Layer w1: v2@46.67,58.35 45.4,59.62 45.4,63.3 46.3,64.2 L6.1@52.12,64.2 ; L6.1@52.1,64.395 52.1,65.67 v2(52.77,66.34) ; v2(71.79,68.89) 71.79,69.68 v2(71.78,69.69) 71.78,92.54 72.44,93.2 79.17,93.2 80.6,91.77 U1.2@80.6,90.35 ; v2(158.41,48.26) 159.52,49.37 v2(159.52,64.59)
  Bottom Layer w1: v2@45.995,59.025 47.7,57.32 v1(47.7,49.215) 47.7,45.87 50.03,43.54 153.68,43.54 v2(159.08,48.94) ; v2(52.11,65.63) 52.11,65.68 v2(52.77,66.34) 53.02,66.59 70.96,66.59 71.79,67.42 v2(71.79,68.89) 71.79,69.66 v2@71.76,69.69 ; v2(135.26,56.84) 132.7,56.84 131.07,58.47 v2(131.07,59.77) 131.07,63.57 134.72,67.22 v2(143.44,67.22) 147.42,67.22 147.9,67.7 v2(150.13,67.7) 152.16,67.7 155.27,64.59 v2(159.52,64.59)
  other v2: 46.66,58.35 45.96,59.05
5V0: C53.1 C54.2 L1.2 L2.2 L4.2 L12.2 Q3.2 R47.1 R59.2 XT1.35 XT1.36 XT1.37 XT1.38 | length 187.8
  Top Layer w0.3: R59.2@88.95,97.905 88.95,96.72 90.33,95.34 ; XT1.38@101.67,96.23 101.67,98.23 101.67,98.26 ; XT1.37@102.17,96.23 102.17,98.18 ; 102.65,98.21 102.67,98.19 XT1.36@102.67,96.23 ; 103.14,98.19 103.17,98.16 XT1.35@103.17,96.23
  Top Layer w0.4: L12.2@139.565,106.36 L12.2@139.57,106.355
  Top Layer w0.5: Q3.2@41.33,89.6 v2(42.597,89.6) 43.865,89.6 R47.1@43.87,89.595 ; v2@66.99,71.65 v2@67,71.64
  Top Layer w0.6: L12.2@139.565,106.36 C53.1@139.565,108.29 v2@139.565,109.59
  Top Layer w0.8: v2(103.91,105.42) 106.93,105.42 108.02,106.51 114.79,106.51 v2(117,108.72)
  Top Layer w1: L2.2@64.4,71.64 v2(66.99,71.64) v2@67,71.64 ; v2(74.39,83.44) v2(74.39,84.37) 74.39,85.41 75.82,86.84 90.33,86.84 ; L4.2@90.36,76.89 90.36,86.84
  Top Layer w1.5: 90.33,86.84 90.33,95.34 93.25,98.26 101.67,98.26 ; 101.67,98.23 102.56,98.23
  Bottom Layer w0.8: v2(42.597,89.6) 46.87,89.6 50.56,93.29 81.69,93.29 84.9,96.5 v2(91.48,96.5) ; v2(100.21,98.27) 100.21,103.09 102.53,105.41 v2@103.93,105.41 ; v2@117.01,108.72 119.55,111.26 137.89,111.26 v2(139.56,109.59)
  Bottom Layer w1: v2@66.09,71.64 v2(66.99,71.64) 69.07,71.64 70.85,73.42 70.85,79.05 74.38,82.58 v2@74.38,84.37
  other v2: 66.09,71.65
A5V0: C40.1 C51.1 L12.1 R50.1 R52.1 U11.5 | length 29.6
  Top Layer w0.2: R50.1@142.045,100.42 R50.1@142.055,100.41
  Top Layer w0.5: v1(128.05,94.25) R52.1@129.445,94.25
  Top Layer w0.6: U11.5@133.76,100.42 139.561,100.42 R50.1@142.045,100.42 ; C51.1@139.57,100.429 L12.1@139.57,104.45
  Top Layer w1: C51.1@139.541,100.4 139.561,100.42 C51.1@139.57,100.429
  Bottom Layer w0.5: v1(128.05,94.25) 137.2,94.25 138.3,95.35 v1(138.3,100.44)
ACC_KEY: R40.1 U10.18 XT1.7 | length 74.2
  Top Layer w0.3: v1(56.97,99.72) 57.5,99.72 57.72,99.94 65.39,99.94 ; v1(56.99,101.98) U10.18@56.99,105.125 ; R40.1@65.41,98.92 65.41,99.92 65.39,99.94 ; XT1.7@117.17,96.23 117.17,100.87 114.94,103.1 113.9,103.1 113.14,103.86 112.36,103.86 112.11,103.61 109.86,103.61 108.55,102.3 72.36,102.3 70,99.94 65.39,99.94
  Bottom Layer w0.3: v1(56.97,99.72) 56.99,99.74 v1(56.99,101.98)
AGND: C40.2 C43.2 C51.2 CN5.2 L13.1 R53.2 U11.2 XT1.1 XT1.3 | length 7.2
  Top Layer w0.3: 119.53,98.48 119.17,98.12 XT1.3@119.17,96.23 119.17,95.325 119.357,95.137 120.22,95.137 120.17,95.187 XT1.1@120.17,96.23 120.17,97.44 120.45,97.72
  other v1: 127.42,92.73 130.39,92.74 133.1,92.73 137.38,92.73 141.05,92.73 145.33,92.73 149,92.73 150.89,92.73 151.9,93.79 140.4,93.83 146.96,94.35 125.37,94.78 124.06,95.53 121.21,95.58 140.84,95.82 132.76,95.93 135.3,96.07 149.12,96.24 144.62,96.31 151.94,96.66 137.18,97.08 121.19,97.1 134.67,97.27 130.39,97.31 132.29,97.34 124.04,97.71 144.92,98.82 122,98.85 119.61,99.07 141.24,99.14 135.41,99.46 123.55,100.38 124.92,100.41 151.9,100.54 121.7,101.19 131.59,101.57 135.47,101.66 133.87,101.74 128.18,102.16 148.61,102.35 144.7,102.57 141.14,102.73 123.66,102.99 151.9,103.6 138.17,103.74 125.25,104.57 128.45,104.64 147.51,104.8 150.57,104.79 144.24,104.84 136.39,105.93 126.71,106 129.53,106.07 133.12,106.07
CORE_PWR_ON: R46.1 XT1.9 | length 17.3
  Top Layer w0.3: v1@109.556,107.896 v1(109.57,107.91) ; v1(111.63,102.52) 112.09,102.52 112.64,101.97 114.45,101.97 116.17,100.25 XT1.9@116.17,96.23
  Top Layer w0.5: R46.1@108.03,107.896 v1@109.556,107.896
  Bottom Layer w0.3: v1(109.57,107.91) 111.26,106.22 111.26,102.946 111.63,102.576 v1(111.63,102.52)
ENC_TUNE_A: CN4.4 U10.12 | length 19.8
  Top Layer w0.3: CN4.4@43.2,99.45 47.346,99.45 47.356,99.46 47.46,99.46 49.17,101.17 49.17,107.86 51.01,109.7 U10.12@54.815,109.7
ENC_TUNE_B: CN4.5 U10.13 | length 19.6
  Top Layer w0.3: CN4.5@43.2,98.95 47.553,98.95 47.563,98.96 47.76,98.96 49.71,100.91 49.71,107.58 51.03,108.9 U10.13@54.815,108.9
ENC_VOL_A: CN3.4 U10.8 | length 166.4
  Top Layer w0.3: v1(56.17,116.1) 56.17,113.495 U10.8@56.19,113.475 ; v1(163.49,61.18) 164.4,61.18 164.78,61.56 CN3.4@166.26,61.56
  Bottom Layer w0.3: v1(56.17,116.1) 56.58,116.1 57.025,116.545 57.53,117.05 158.41,117.05 160.01,115.45 160.01,95.37 163.58,91.8 163.58,62.69 163.28,62.39 163.28,61.525 163.49,61.315 v1(163.49,61.18)
ENC_VOL_B: CN3.5 U10.9 | length 173.5
  Top Layer w0.3: v1(52.13,112.08) 52.15,112.1 U10.9@54.815,112.1 ; v1(164.16,62.07) v1@164.17,62.06 ; v1@164.38,62.06 CN3.5@166.26,62.06
  Bottom Layer w0.3: v1(52.13,112.08) 52.13,115.89 53.84,117.6 158.71,117.6 160.58,115.73 160.58,95.6 164.16,92.02 v1(164.16,62.07)
GND: C1.2 C2.1 C3.1 C4.2 C5.1 C8.1 C9.1 C11.1 C12.1 C13.1 C14.1 C15.1 C16.1 C17.1 C18.1 C19.1 C20.1 C21.2 C22.2 C23.1 C24.2 C25.1 C26.2 C27.1 C28.1 C29.1 C30.1 C31.2 C32.2 C33.2 C34.1 C35.2 C36.2 C37.2 C38.2 C39.2 C42.2 C44.2 C45.2 C46.2 C47.1 C48.1 C49.1 C53.2 C54.1 CN1. CN1.9 CN1.12 CN1.15 CN1.18 CN1.21 CN1.24 CN1.26 CN1.28 CN1.33 CN2. CN2.3 CN3. CN3.1 CN3.6 CN3.9 CN4. CN4.1 CN4.6 CN4.8 L13.2 P1.4 pad. R5.1 R6.2 R9.1 R12.1 R15.1 R18.1 R19.1 R20.1 R24.2 R25.2 R26.2 R27.1 R29.1 R30.1 R31.1 R35.1 R36.1 R41.1 R49.1 R51.2 R55.2 R56.2 R60.2 U1.1 U2.2 U3.4 U4.3 U5.23 U5.26 U5.52 U5.65 U6.2 U7.1 U8.3 U9.3 U10.16 U10.32 XT1. XT1.17 XT1.20 XT1.23 XT1.26 XT1.29 XT1.32 XT1.33 XT1.34 Z1.2 | length 151
  Top Layer w0.3: 41.32,97.64 41.51,97.45 CN4.8@43.2,97.45 44.7,97.45 ; v1@41.46,98.3 41.61,98.45 CN4.6@43.2,98.45 48.03,98.45 48.45,98.87 ; 48.7,99.03 v1(49.38,99.03) ; 59.525,57.415 CN1.9@59.525,59.5 59.525,60.98 ; CN1.12@61.025,59.5 v1(61.025,60.98) ; 61.61,110.83 61.61,111.253 62.332,111.975 62.422,111.975 62.547,112.1 U10.32@63.165,112.1 ; CN1.15@62.525,59.5 v1(62.525,60.98) ; v1(64.025,60.985) CN1.18@64.025,59.5 64.025,55.337 ccw(c66.565,55.337) 64.908,53.412 69.374,48.946 ccw(c70.21,49.783) v1(70.21,48.6) ; 65.525,55.844 CN1.21@65.525,59.5 v1(65.525,60.98) ; 66.13,61.57 67.025,60.675 CN1.24@67.025,59.5 67.025,57.745 67.02,57.74 ; 67.43,64.4 67.43,63.86 68.025,63.265 CN1.26@68.025,59.5 68.025,57.435 ; 69.025,57.305 CN1.28@69.025,59.5 69.025,61.655 69.17,61.8 69.17,62.11 69.48,62.42 ; 71.525,57.885 CN1.33@71.525,59.5 71.525,60.585 71.75,60.81 71.75,61.33 ; 98.975,43.175 U5.52@98.975,44.975 ; 100.475,54.015 U5.26@100.475,56.075 ; 101.975,54.005 U5.23@101.975,56.075 101.975,67.825 ; 103.67,94.72 XT1.34@103.67,96.23 103.67,98.9 ; 104.17,94.77 XT1.33@104.17,96.23 ; 104.67,94.79 XT1.32@104.67,96.23 104.67,97.703 cw(c104.807,97.703) v1(104.71,97.8) ; v1(105.79,92.25) ccw(c105.79,92.63) 106.17,92.63 XT1.29@106.17,96.23 v1(106.17,97.8) ; v1(107.35,85.97) ccw(c107.35,86.29) 107.67,86.29 XT1.26@107.67,96.23 v1(107.67,97.8) ; XT1.23@109.17,96.23 109.17,97.8 v1(109.18,97.8) ; v1(110.67,97.8) XT1.20@110.67,96.23 110.67,87.13 v1(110.97,87.13) ; v1(112.17,97.8) XT1.17@112.17,96.23 112.17,89.14 v1(112.65,89.14) ; 149.925,56.445 CN2.3@149.925,58.475 v1@149.925,62.07 ; C37.2@160.7,66.495 162.515,66.495 163.74,65.27 163.74,63.85 165.03,62.56 CN3.6@166.26,62.56 167.51,62.56 v1(168.06,62.01) ; 164.06,64.06 CN3.9@166.26,64.06 ; 165.085,59.525 165.62,60.06 CN3.1@166.26,60.06 168,60.06 v1(168.07,60.13)
  Top Layer w0.5: U10.16@54.815,106.5 56.14,106.5 56.42,106.78
  Bottom Layer w0.3: 55.53,119.31 57.22,119.31
  other v1: 36.32,38.28 30.54,38.3 172.33,38.49 164.9,38.6 38.11,40.52 40.75,43.26 44.96,43.26 38.11,43.3 47.71,43.3 155.99,43.33 158.93,43.38 162.47,43.42 172.33,43.8 30.36,43.96 69.65,44.85 94.54,45.08 88.85,45.13 96.31,45.32 153.05,45.37 107.61,45.39 60.24,45.41 63.99,45.41 115.4,45.5 118.62,45.5 43.52,45.51 123.92,45.52 129.21,45.52 134.52,45.52 139.82,45.52 145.11,45.52 150.41,45.52 51.67,45.53 56.64,45.53 67.91,45.6 158.49,45.61 137.39,46.16 89.64,46.21 49.84,46.48 45.84,46.6 169.7,46.74 164.77,46.85 40.83,46.97 66.18,47.06 161.25,47.38 119.09,47.58 60.75,47.62 54.25,47.75 155.41,47.76 123.21,47.94 132.4,47.94 75.26,47.99 79.71,47.99 101.59,48.09 103.26,48.14 128.01,48.13 30.34,48.16 57.38,48.16 97.29,48.17 100.06,48.17 71.41,48.25 113.29,48.37 115.39,48.37 142.79,48.45 82.06,48.48 64.64,48.52 77.62,48.53 35.4,48.56 108.42,48.65 137.93,48.87 172.33,49.13 49.4,49.2 150.95,49.31 101.22,49.39 102.36,49.37 100.1,49.41 147.35,49.54 161.58,49.66 52.21,49.84 168.66,49.9 103.26,49.97 63.43,50.02 40.88,50.21 55.93,50.28 157.69,50.3 61.44,50.41 100.08,50.55 101.24,50.55 102.35,50.55 87.34,50.6 70.94,50.65 83.6,50.67 74.51,50.71 77.81,50.7 81.12,50.69 88.53,50.73 137.15,50.89 59.51,51.15 153.38,51.33 112.75,51.36 43.94,51.39 115.6,51.41 141.97,51.48 118.86,51.52 35.08,51.54 108.57,51.61 100.09,51.65 101.24,51.64 102.36,51.65 124,51.68 165.43,52 103.64,52.03 30.33,52.37 58.3,52.52 145.13,52.52 161.21,52.53 113.19,52.68 116.06,52.76 99.82,52.79 101.11,52.77 157.65,52.86 102.54,52.88 137.17,52.96 70.84,53.03 122.87,53.07 53.09,53.17 74.7,53.15 124.88,53.15 127.26,53.15 40.85,53.19 76.65,53.26 79.66,53.26 82.66,53.26 85.67,53.26 88.67,53.26 129.63,53.49 132.32,53.51 133.91,53.51 50.63,53.56 149.57,53.57 90.78,53.65 99.62,53.83 103.36,53.83 101.53,53.9 34.89,54.42 68.77,54.44 172.31,54.46 74.76,54.55 155.75,54.62 140.13,54.76 58.34,54.96 70.63,55.05 169.08,55.08 165.25,55.27 108.13,55.32 106.3,55.51 55.51,55.58 161.14,55.58 94.83,55.59 87,55.64 96.38,55.77 67.62,56.12 49.62,56.13 80.25,56.15 126,56.15 157.65,56.38 43.91,56.51 124.91,56.51 74.7,56.54 108.04,56.55 130.84,56.53 30.33,56.57 83.99,56.59 106.21,56.63 70.87,56.67 148.5,56.67 150.5,56.67 41.04,56.74 59.15,57.1 95.03,57.18 96.37,57.2 136.81,57.31 111.67,57.4 122.36,57.42 113.88,57.49 117.44,57.55 89.54,57.57 55.93,57.71 68.97,57.73 73.04,57.84 34.97,58 140.05,58.31 162.93,58.31 52.15,58.35 133.43,58.34 54.33,58.42 155.21,58.45 164.76,58.45 82.12,58.55 49.18,58.67 143.11,58.68 160.9,58.77 146.19,58.85 79.38,58.95 40.75,59.14 111.58,59.55 109.4,59.57 113.88,59.72 104.77,59.75 172.31,59.79 85.99,59.82 157.65,59.9 136.56,59.93 153.27,60.02 97.64,60.1 89.63,60.26 93.14,60.25 51.18,60.38 44.07,60.53 54.1,60.58 120.42,60.67 122.35,60.69 134.7,60.75 30.33,60.78 161.01,61.4 170.54,61.45 124.99,61.51 78.62,61.6 81.8,61.6 35.18,61.64 145.54,61.68 104.73,61.72 95.29,61.77 117.66,61.9 149.92,61.9 113.85,61.93 109.91,61.99 97.53,62.05 59.37,62.08 84.94,62.13 107.85,62.14 138.88,62.13 91.09,62.16 93.17,62.19 126.9,62.28 41.19,62.33 88.24,62.32 66.28,62.54 128.69,62.6 132.83,62.61 153.54,62.6 155.07,62.65 150.82,62.81 157.69,62.86 111.52,62.89 160.94,63.37 76.26,63.57 83.07,63.68 79.33,63.81 121.25,63.81 96.2,63.94 142.62,64.09 113.88,64.24 106.07,64.28 110.12,64.35 139.85,64.33 117.65,64.46 148.43,64.46 125.92,64.67 93.2,64.7 44.07,64.73 69.8,64.74 35.7,64.76 134.85,64.93 30.33,64.98 65.48,65.02 41.04,65.07 60.65,65.08 97.72,65.09 172.31,65.11 53.97,65.13 67.41,65.26 91.36,65.28 107.47,65.31 137.71,65.44 50.87,65.45 130.41,65.6 148.41,65.94 72.43,66.05 104.87,66.32 89.37,66.53 112.48,66.51 95.95,66.61 47.59,66.67 98.35,66.69 100.11,66.69 113.88,66.7 121.54,66.89 81.71,66.9 44.59,66.98 79.19,66.97 77.05,67.02 117.65,67.02 125.98,67.12 155.04,67.13 93.23,67.24 166.05,67.28 132.47,67.49 106.4,67.53 40.95,67.71 109.78,67.73 35.34,68.01 73.65,68.09 98.55,68.09 161.1,68.11 46.08,68.18 67.39,68.29 51.79,68.39 49.66,68.62 88.89,68.68 53.75,68.79 158.94,68.83 91.56,68.89 152.88,68.88 83.42,68.98 104.92,69.19 148.79,69.21 128.04,69.23 139.87,69.24 142.6,69.24 113.88,69.27 30.27,69.28 121.33,69.28 134.59,69.31 137.74,69.33 101.65,69.46 168.17,69.47 117.65,69.57 99.71,69.59 63.28,69.63 156.05,69.63 130.63,69.64 125.58,69.95 111.4,69.97 58.92,70.05 108.88,70.06 80.04,70.13 93.3,70.16 42.54,70.23 51.06,70.24 48.38,70.27 172.31,70.42 147.32,70.44 154.38,70.47 53.78,70.5 150.65,70.5 73.62,70.66 96.4,70.8 60.83,70.93 77.75,70.95 106.67,70.95 166.07,70.97 100.49,71.15 82.59,71.24 90.08,71.31 161.06,71.56 113.88,71.84 44.63,71.86 35.68,71.9 58.45,71.92 88.74,72.06 111.47,72.12 98.66,72.55 102.88,72.55 101.41,72.57 60.72,72.62 168.22,72.61 63.32,72.64 77.78,72.68 124.86,72.7 132.99,72.74 42.08,72.8 50.05,72.8 140.85,72.84 137.86,72.91 144.09,72.91 147.52,72.93 150.94,72.95 131.07,72.98 154.35,72.97 156.82,73.01 66.58,73.1 109.4,73.1 105.05,73.19 120.65,73.19 128.32,73.17 117.65,73.38 93.3,73.4 30.21,73.53 40.25,74.05 111.51,74.07 136.44,74.24 100.96,74.26 107.33,74.32 69.05,74.39 113.88,74.41 166.09,74.51 96.73,74.52 84.96,74.64 117.65,74.65 73.46,74.73 88.24,74.77 89.77,74.85 77.81,74.9 129.53,74.9 126.59,74.95 161.06,75.01 122.56,75.03 86.77,75.16 82.16,75.28 47.55,75.33 35.02,75.43 64.35,75.45 93.3,75.55 140.6,75.66 113.88,75.69 101.9,75.73 172.31,75.73 153.84,76.12 168.22,76.13 157.89,76.16 133.14,76.18 144.32,76.33 149.7,76.33 99.58,76.64 54.49,76.81 135.97,76.85 63.73,76.95 109.46,76.95 102.77,77.07 111.45,77.08 117.65,77.19 73.44,77.32 86.57,77.43 120.08,77.54 93.3,77.7 30.21,77.74 96.59,77.74 47.5,77.83 59.16,77.98 82.12,78.03 166.11,78.05 126.27,78.13 138.72,78.13 146.99,78.17 62.29,78.23 113.88,78.25 161.06,78.46 77.49,78.54 111.58,78.62 122.95,78.65 102.6,78.69 100.75,78.71 39.03,78.82 130.77,78.81 34.89,79.17 54.32,79.25 172.28,79.29 157.89,79.59 154.3,79.63 168.24,79.64 68.72,79.66 66.29,79.74 117.65,79.73 133.81,79.76 75.6,79.78 93.31,79.86 41.19,80.18 51.11,80.19 142.56,80.34 30.21,80.54 54.66,80.71 77.36,80.73 57.4,80.82 113.88,80.82 65.17,80.96 96.77,80.96 150.41,81.01 86.52,81.05 48.01,81.09 82.12,81.18 100.37,81.3 127.99,81.4 59.17,81.54 122.55,81.65 61.52,81.74 161.02,81.91 119.49,82 93.33,82.02 166.25,82.03 130.93,82.1 70.37,82.58 41.22,82.71 67.65,82.74 168.08,82.85 172.26,82.85 138.3,82.97 157.89,83.02 73.1,83.12 134.08,83.14 154.34,83.14 113.88,83.4 87.94,83.45 100.6,83.5 44.54,83.55 117.03,83.53 35.23,83.62 120.74,83.72 146.74,83.72 125.65,83.8 102.39,83.92 78.03,83.96 65.97,83.99 85.97,84.12 80.13,84.15 93.33,84.17 82.08,84.19 83.85,84.24 30.21,84.75 96.73,84.77 166.14,84.77 67.39,84.82 70.32,84.87 124.08,84.95 142.81,85.18 41.68,85.37 161.02,85.36 119.6,85.62 44.83,85.78 65.77,85.94 105.2,85.95 111.43,85.97 48.44,86.11 50.98,86.11 168.28,86.1 54.21,86.13 150.96,86.19 93.33,86.32 172.24,86.41 157.89,86.45 130.99,86.6 67.42,86.63 73.15,86.63 36.42,86.71 102.31,86.84 117.01,86.94 113.88,86.96 70.29,87.06 138.18,87.11 57.2,87.15 120.77,87.45 105.16,87.53 154.59,87.86 134.33,87.9 146.45,87.94 98.98,87.99 166.05,88 65.28,88.15 81.47,88.34 63.75,88.38 77.33,88.39 93.33,88.48 131.12,88.48 59.68,88.61 88.31,88.72 124.29,88.74 85.48,88.78 161,88.81 30.21,88.95 119.46,89.04 102.28,89.16 48.45,89.24 168.24,89.24 50.69,89.42 157.89,89.41 95.9,89.6 53.01,89.71 74.34,89.91 105.33,89.91 69.84,89.96 172.24,89.97 36.63,90.35 143.1,90.4 149.54,90.45 133.75,90.53 138.3,90.61 93.33,90.64 146.86,90.78 160.93,90.78 124.55,90.85 130.59,90.98 152.57,91.12 33.2,91.18 126.69,91.21 102.24,91.23 156.04,91.42 166.09,91.56 51.03,91.62 65.59,91.64 57.41,91.71 60.67,91.71 54.18,91.77 69.96,91.76 88.01,92.15 118.4,92.25 159.41,92.34 83.2,92.58 45.08,92.65 95.38,92.74 153.86,92.73 168.08,92.78 124.45,92.9 47.17,92.99 38.14,93.07 30.21,93.16 116.49,93.19 42.63,93.27 172.24,93.53 102.92,93.67 93.27,93.8 164.74,94.08 157.65,94.29 116.16,94.57 47.58,94.65 49.22,94.72 85.73,94.77 153.86,94.92 88.02,94.94 94.55,95.23 168.24,95.25 44.22,95.3 80.52,95.3 76.37,95.48 33.48,95.86 155.77,96.29 162.42,96.4 77.77,96.57 44.93,96.94 166.2,97 61.51,97.08 172.24,97.09 47.58,97.1 50.95,97.1 53.87,97.1 56.78,97.1 30.21,97.36 157.63,97.72 83.06,98 41.31,98.05 113.91,98.07 153.88,98.34 84.38,98.58 164.39,98.7 77.69,98.81 40.51,98.86 79.3,98.91 58.6,98.94 70.3,98.93 61.49,98.97 63.84,99.01 55.07,99.08 52.67,99.14 74.51,99.13 109.94,99.41 113.1,99.59 155.81,99.61 162.36,99.83 108.33,99.95 93.73,99.99 95.86,99.99 97.98,99.99 105.53,99.99 101.64,100.03 79.88,100.05 77.89,100.09 81.61,100.12 90.41,100.19 50.8,100.36 169.5,100.44 172.24,100.65 34.39,100.76 157.61,101.15 40.22,101.23 72.73,101.26 30.21,101.57 42.29,101.94 46.79,102.11 162.29,102.13 58.4,102.3 166.59,102.41 153.71,102.63 110.27,102.67 50.62,102.88 120.56,102.89 155.85,103.02 121.99,103.89 53.13,104.05 44.76,104.14 172.24,104.21 157.61,104.58 83.01,104.6 98.19,104.62 85.84,104.64 80.36,104.68 89.24,104.7 64.52,104.74 67.64,104.89 94.66,104.9 100.08,104.92 41.55,104.99 92.05,104.97 120.47,105.18 54.9,105.2 63.01,105.37 152.49,105.57 162.29,105.65 46.79,105.66 50.6,105.66 30.21,105.77 53.16,105.83 117.77,105.93 68.92,106.19 74.69,106.24 99.91,106.3 124.46,106.53 116.98,106.68 145.61,106.72 149.04,106.72 122.61,106.94 61.13,107.01 86.92,107.02 96.96,107.17 84.01,107.22 142.76,107.24 90.37,107.35 93.59,107.37 120.71,107.37 154.93,107.41 81.8,107.49 117.77,107.62 40.73,107.64 51.13,107.7 172.24,107.77 129.62,107.79 111.7,107.88 133.74,108.01 157.61,108.01 152.34,108.03 78.09,108.06 58.51,108.52 61.07,108.56 100.06,108.74 102.02,108.79 114.92,108.8 104.03,108.81 97.58,109.02 107.16,109.03 162.22,109.1 137.4,109.17 47.01,109.44 56.92,109.48 44.19,109.55 122.68,109.59 124.82,109.59 128.06,109.62 134.81,109.74 131.19,109.77 120.64,109.81 58.33,109.89 72.44,109.96 30.21,109.98 74.79,109.97 69.82,110.02 83.13,110.07 95.34,110.06 89.36,110.1 114.2,110.29 166.91,110.32 40.87,110.51 149.02,110.6 145.72,110.62 116.61,110.64 141.94,110.9 115.74,111.16 77.77,111.21 172.24,111.35 56.81,111.37 157.61,111.46 154.78,111.84 99.52,111.91 151.84,112.1 169.59,112.47 139.48,112.61 162.24,112.63 122.48,112.71 129.55,112.78 136.21,112.78 126.07,112.8 132.77,112.83 119.14,112.87 64.84,112.97 53.78,113.23 37.2,113.32 97.91,113.5 34.17,113.63 78.47,113.88 83.15,113.87 95.02,113.87 89.15,113.9 62.94,113.94 45.1,114.06 30.21,114.18 157.59,114.48 101.81,114.51 104.75,114.51 120.9,114.5 124.33,114.5 127.8,114.5 131.25,114.5 134.7,114.5 138.15,114.5 141.6,114.5 145.05,114.5 148.5,114.5 151.95,114.5 155.4,114.5 166.61,114.59 172.24,114.89 40.81,114.97 50.4,115.19 53.47,115.25 109.84,115.3 103.21,115.41 100.66,115.49 117.91,115.95 162.27,116.17 169.53,116.18 54.46,116.48 34.02,116.54 48.41,117.11 30.09,118.15 161.1,118.27 35.03,118.35 39.35,118.39 45.49,118.41 51.61,118.43 172.24,118.45 54.78,118.76 152.91,118.94 158.08,118.94 60.59,118.98 67.53,118.98 74.47,118.98 77.45,118.98 83.4,118.98 90.34,118.98 96.29,118.98 101.25,118.98 106.21,118.98 112.16,118.98 117.12,118.98 122.07,118.98 126.04,118.98 130.01,118.98 132.99,118.98 136.95,118.98 140.92,118.98 144.82,118.97 148.84,118.97 166.64,119.04 172.84,120.4 30.37,120.7 68.44,121.59 73.93,121.59 79.41,121.59 84.89,121.59 90.37,121.59 95.85,121.59 101.34,121.59 106.82,121.59 112.3,121.59 117.78,121.59 123.26,121.59 128.75,121.59 134.23,121.59 32.75,121.62 37.66,121.62 42.57,121.62 48.72,121.62 53.64,121.62 58.56,121.62 63.48,121.61 139.71,121.62 145.19,121.62 150.67,121.62 156.16,121.62 161.64,121.62 167.12,121.62 171.51,121.62
I2C1_SCL_18: U5.15 U7.3 XT1.15 | length 60.1
  Top Layer w0.3: U5.15@106.775,53.775 119.225,53.775 119.44,53.99 119.44,54.7 119.22,54.92 U7.3@118.165,54.92 U7.3@117.51,54.92 ; XT1.15@113.17,96.23 113.17,91.04 114.92,89.29 v1@115.47,89.29
  Bottom Layer w0.3: v1(114.61,53.52) 115.08,53.99 115.08,54.45 115.55,54.92 115.55,87.71 115.84,88 115.84,88.864 115.48,89.224 v1(115.48,89.29)
I2C1_SCL_33: CN2.6 R33.2 U7.6 U10.29 | length 151.6
  Top Layer w0.3: U10.29@63.165,109.7 64.48,109.7 64.92,109.26 v1(66.15,109.26) ; U7.6@120.91,54.92 U7.6@121.565,54.92 126.52,54.92 v1(127.59,55.99) R33.2@127.59,57.845 ; v1(134.22,73.34) 134.86,73.34 136,72.2 136,62.36 137.91,60.45 140.78,60.45 v1(141.32,59.91) 141.49,60.08 148.09,60.08 148.425,59.745 CN2.6@148.425,58.475
  Bottom Layer w0.3: v1(66.15,109.26) 66.15,109.51 66.47,109.83 66.47,110.29 67.21,111.03 75.96,111.03 77.4,112.47 96.69,112.47 99.14,110.02 110.84,110.02 118.2,102.66 118.2,95.65 122.06,91.79 122.06,84.25 132.43,73.88 133.68,73.88 v1(134.22,73.34) ; v1(127.59,55.99) 128.82,54.76 137,54.76 138.53,56.29 138.53,58.86 139.58,59.91 v1(141.32,59.91)
I2C1_SDA_18: U5.16 U7.4 XT1.16 | length 55
  Top Layer w0.3: U5.16@106.775,54.275 U7.4@118.82,54.275 ; XT1.16@112.67,96.23 112.67,90.68 v1(114.98,88.37)
  Bottom Layer w0.3: v1(114.28,54.53) 114.98,55.23 v1(114.98,88.37)
I2C1_SDA_33: CN2.5 R34.2 U7.5 U10.30 | length 152.2
  Top Layer w0.3: U10.30@63.165,110.5 64.64,110.5 64.959,110.181 65.539,110.181 v1(65.55,110.17) ; U7.5@120.91,54.27 U7.5@121.565,54.27 127.83,54.27 v1(129.44,55.88) R34.2@129.44,57.845 ; v1@134.535,74.485 136.58,72.44 136.58,62.63 138.18,61.03 v1(141.61,61.03) 142.02,60.62 148.31,60.62 148.925,60.005 CN2.5@148.925,58.475
  Bottom Layer w0.3: v1(65.55,110.17) 66.99,111.61 75.73,111.61 77.14,113.02 96.96,113.02 99.4,110.58 111.06,110.58 118.75,102.89 118.75,95.9 122.63,92.02 122.63,84.46 132.65,74.44 v1(134.49,74.44) ; v1(129.44,55.88) 129.99,55.33 136.74,55.33 137.98,56.57 137.98,59.12 139.33,60.47 140.73,60.47 141.194,60.934 141.514,60.934 v1(141.61,61.03)
ILL_KEY: R48.2 XT1.8 | length 89.6
  Top Layer w0.3: R48.2@45.69,89.595 45.69,91.02 v1(45.7,91.03) ; v1(112.73,103.08) 112.97,102.84 113.286,102.53 114.664,102.542 116.67,100.57 XT1.8@116.67,96.23
  Bottom Layer w0.3: v1(45.7,91.03) 47.07,91.03 50.17,94.13 81.31,94.13 84.53,97.35 89.27,97.35 99.38,107.46 108.2,107.46 108.72,107.98 108.72,108.29 109.18,108.75 109.93,108.75 110.37,108.31 110.37,107.93 111.83,106.47 111.83,103.45 112.164,103.116 112.694,103.116 v1(112.73,103.08)
KEY_EJECT: CN3.10 U10.7 | length 168.3
  Top Layer w0.3: v1(56.39,118.39) 56.39,117.36 56.99,116.76 U10.7@56.99,113.475 ; CN3.10@166.26,64.56 167.92,64.56 v1(167.93,64.57)
  Bottom Layer w0.3: v1(56.39,118.39) 56.45,118.39 56.71,118.13 158.98,118.13 161.15,115.96 161.15,95.85 164.73,92.27 164.73,65.17 165.33,64.57 v1(167.93,64.57)
KEY_POWER: CN3.2 R42.1 U10.6 | length 171.2
  Top Layer w0.3: U10.6@57.79,113.475 57.79,111.63 58.3,111.12 v1@58.84,111.12 ; R42.1@112.84,112.01 112.86,112.03 114.31,112.03 v1(114.31,112.1) ; v1(162.08,59.51) 163.02,59.51 163.31,59.8 164.05,59.8 164.28,60.03 164.76,60.03 165.29,60.56 CN3.2@166.26,60.56
  Bottom Layer w0.3: v1(58.8,111.12) 59.23,111.55 65.04,111.55 66.43,112.94 75.1,112.94 76.89,114.73 98.22,114.73 100.58,112.37 113.74,112.37 114.08,112.03 114.55,112.03 114.87,112.35 116.222,112.35 116.242,112.37 116.41,112.37 116.61,112.57 117.12,112.57 120.48,115.93 157.97,115.93 158.9,115 158.9,94.88 162.45,91.33 162.45,63.18 162.11,62.84 162.11,60.95 161.91,60.75 161.91,60.01 161.984,59.936 161.984,59.606 v1(162.08,59.51)
KEYS: CN4.2 R41.2 U10.11 | length 21
  Top Layer w0.3: CN4.2@43.2,100.45 47.66,100.45 48.64,101.43 48.64,108.17 50.765,110.295 ; R41.2@49.86,111.19 50.755,110.295 50.765,110.295 ; U10.11@54.815,110.5 50.97,110.5 50.765,110.295
L/R: CN1.7 R22.2 R25.1 | length 21.2
  Top Layer w0.3: R25.1@45.8,48.32 46.76,49.28 46.76,50.94 47.02,51.2 55.09,51.2 57.22,53.33 57.22,56.6 58.525,57.905 CN1.7@58.525,59.5